# EAGLE board shield10 (EAGLE 8.7.1)
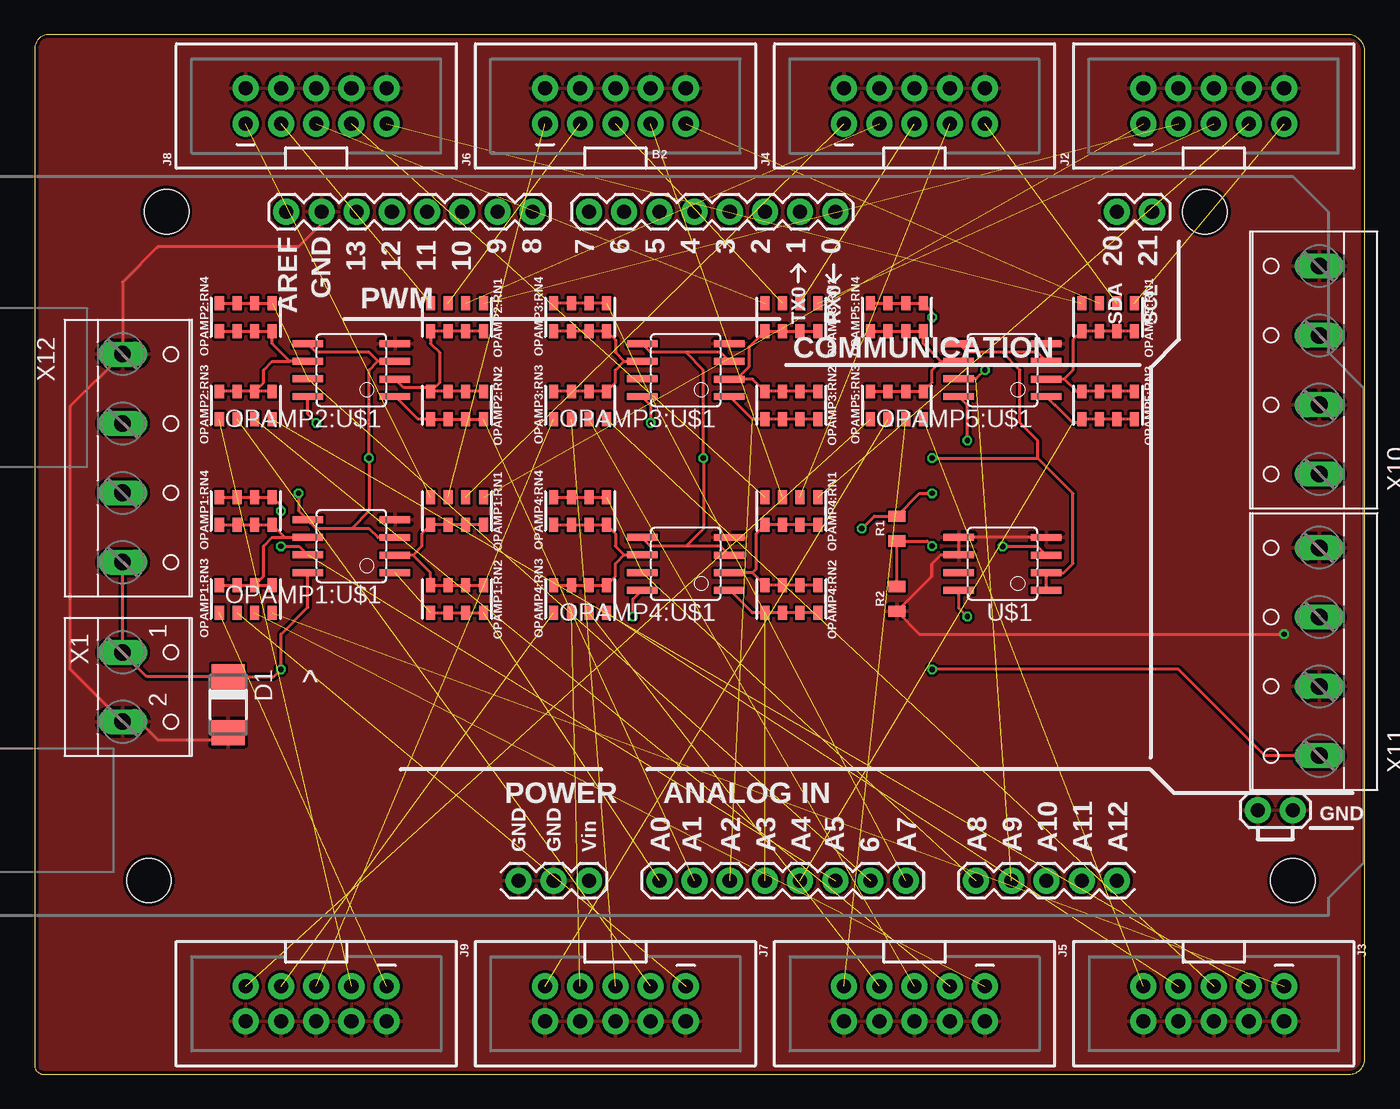
[diagram p0: board, top side]
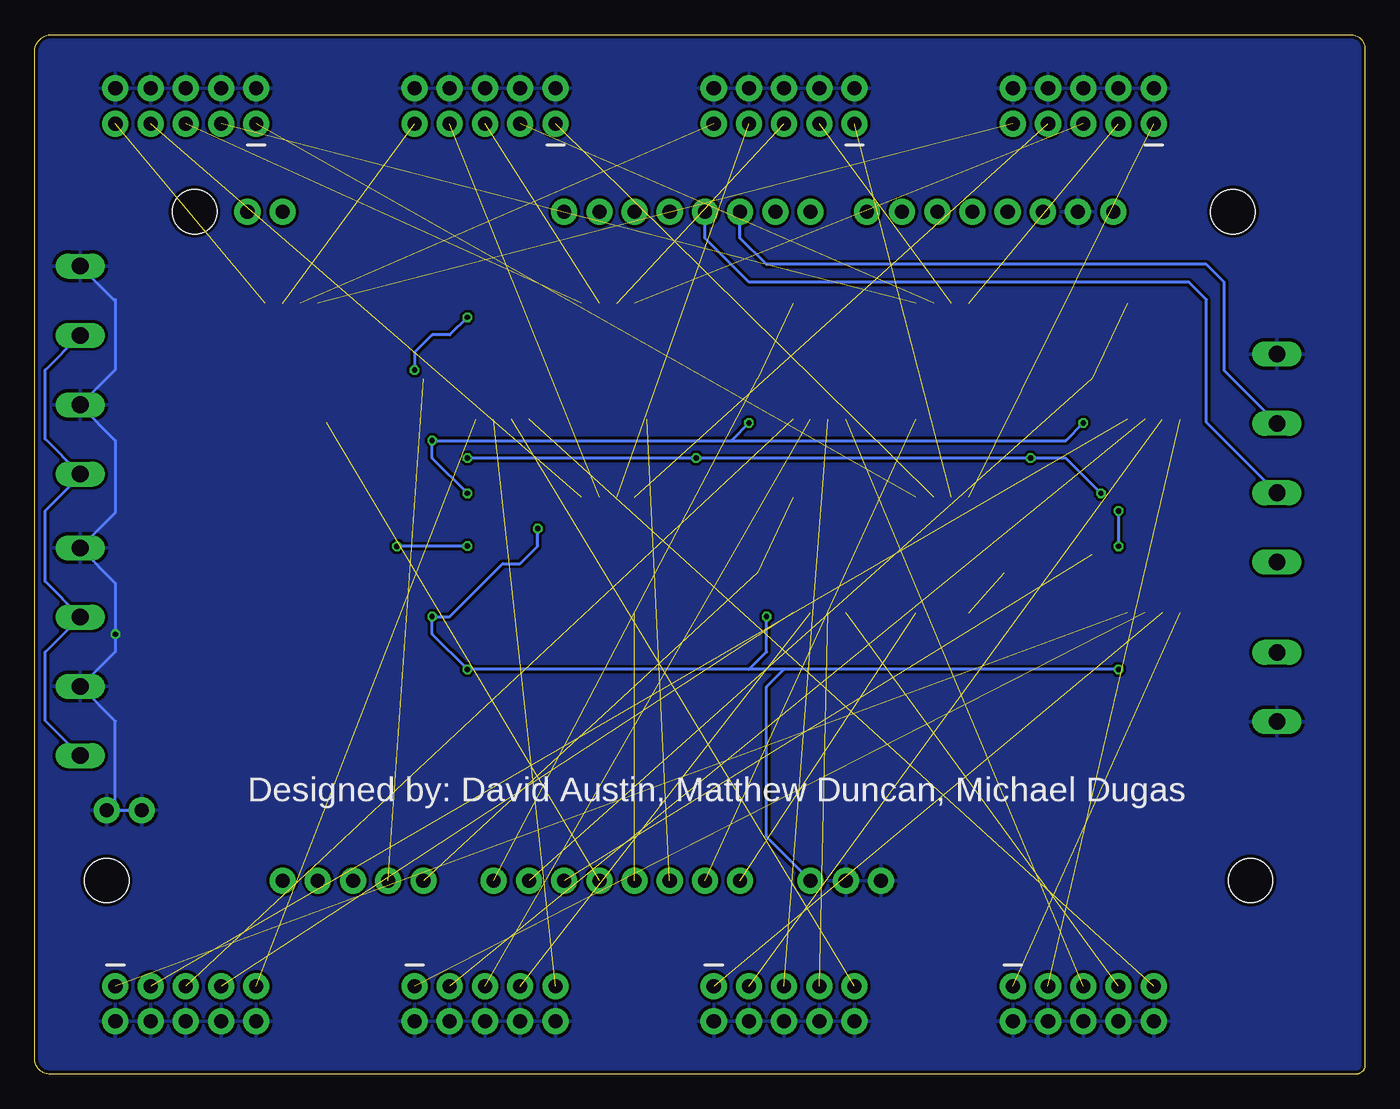
[diagram p1: board, bottom side, seen from below]

Size 96 x 75 mm. Coordinates in mm from the lower left corner, seen from the top.
Outline: 0,74 0,0.64 arc90 0.64,0 94.87,0 arc90 96,1.13 96,73.78 arc90 94.78,75 1,75 arc90 0,74
Copper layers (1*16): Top 0.035mm / dielectric 1.5mm / Bottom 0.035mm
Design rules "Dirty8TS *": minimum track width 5mil, minimum drill 12mil, track to track 8mil, track to pad 8mil, pad to pad 8mil, via to via 8mil, smd to smd 0mil, copper to edge 10mil, drill to drill 10mil, minimum pad ring 10mil, minimum via ring 6mil, stop-mask expansion 2mil, vias tented up to drill 25mil, thermal gap 10mil
Net classes: 0 default: width 0.203 mm, drill 0.381 mm, clearance 0.203 mm

## Footprints (pad centres in the part's own frame; a part is rotated, then mirrored left to right if it is on the bottom)
ARDUINO_MEGA_EDIT = drill 1.016 pad 1.88: 0 13.97,24.13; 1 11.43,24.13; 2 8.89,24.13; 3 6.35,24.13; 4 3.81,24.13; 5 1.27,24.13; 6 -1.27,24.13; 7 -3.81,24.13; 8 -7.874,24.13; 9 -10.414,24.13; 10 -12.954,24.13; 11 -15.494,24.13; 12 -18.034,24.13; 13 -20.574,24.13; 20 34.29,24.13; 21 36.83,24.13; A0 1.27,-24.13; A1 3.81,-24.13; A2 6.35,-24.13; A3 8.89,-24.13; A4 11.43,-24.13; A5 13.97,-24.13; A6 16.51,-24.13; A7 19.05,-24.13; A8 24.13,-24.13; A9 26.67,-24.13; A10 29.21,-24.13; A11 31.75,-24.13; A12 34.29,-24.13; AREF -25.654,24.13; GND@0 -8.89,-24.13; GND@1 -6.35,-24.13; GND@2 44.45,-19.05; GND@3 46.99,-19.05; GND@4 -23.114,24.13; VIN -3.81,-24.13 | hole 3.2: -34.29,24.13; -35.56,-24.13; 40.64,24.13; 46.99,-24.13
DO-214AC = smd 1.8 x 2.4: A 2.025,0; C -2.025,0
2X5-SHROUDED = drill 1.016 pad 1.88: 1 -1.27,5.08; 2 1.27,5.08; 3 -1.27,2.54; 4 1.27,2.54; 5 -1.27,0; 6 1.27,0; 7 -1.27,-2.54; 8 1.27,-2.54; 9 -1.27,-5.08; 10 1.27,-5.08
0805-ARV_EDIT10K = smd 0.65 x 1: 1 -1.905,-1; 2 -0.635,-1; 3 0.635,-1; 4 1.905,-1; 5 1.905,1; 6 0.635,1; 7 -0.635,1; 8 -1.905,1
SOIC8 = smd 0.5 x 2.2: 1 -1.905,-3.154; 2 -0.645,-3.154; 3 0.625,-3.154; 4 1.895,-3.154; 5 1.905,3.154; 6 0.635,3.154; 7 -0.635,3.154; 8 -1.905,3.154
0805 = smd 0.8 x 1.2: 1 -0.9,0; 2 0.9,0
W237-102 = drill 1.194 long: 1 -2.5,-1.27; 2 2.5,-1.27
W237-4 = drill 1.194 long: 1 -7.5,-1.27; 2 -2.5,-1.27; 3 2.5,-1.27; 4 7.5,-1.27

## Placement (x,y rotation side)
B2  ARDUINO_MEGA_R3_EDIT  [ARDUINO_MEGA_EDIT]  43.81,38.1 0 top
D1  [DO-214AC]  13.97,26.67 270 top
J2  AVR_SPI_PROG_5X2_NEWPTH2  [2X5-SHROUDED]  85.09,69.85 90 top
J3  AVR_SPI_PROG_5X2_NEWPTH2  [2X5-SHROUDED]  85.09,5.08 270 top
J4  AVR_SPI_PROG_5X2_NEWPTH2  [2X5-SHROUDED]  63.5,69.85 90 top
J5  AVR_SPI_PROG_5X2_NEWPTH2  [2X5-SHROUDED]  63.5,5.08 270 top
J6  AVR_SPI_PROG_5X2_NEWPTH2  [2X5-SHROUDED]  41.91,69.85 90 top
J7  AVR_SPI_PROG_5X2_NEWPTH2  [2X5-SHROUDED]  41.91,5.08 270 top
J8  AVR_SPI_PROG_5X2_NEWPTH2  [2X5-SHROUDED]  20.32,69.85 90 top
J9  AVR_SPI_PROG_5X2_NEWPTH2  [2X5-SHROUDED]  20.32,5.08 270 top
OPAMP1:RN1  10k  [0805-ARV_EDIT10K]  30.48,40.64 180 top
OPAMP1:RN2  10k  [0805-ARV_EDIT10K]  30.48,34.29 180 top
OPAMP1:RN3  10k  [0805-ARV_EDIT10K]  15.24,34.29 0 top
OPAMP1:RN4  10k  [0805-ARV_EDIT10K]  15.24,40.64 0 top
OPAMP1:U$1  MCP6002SMT  [SOIC8]  22.86,38.1 90 top
OPAMP2:RN1  10k  [0805-ARV_EDIT10K]  30.48,54.61 180 top
OPAMP2:RN2  10k  [0805-ARV_EDIT10K]  30.48,48.26 180 top
OPAMP2:RN3  10k  [0805-ARV_EDIT10K]  15.24,48.26 0 top
OPAMP2:RN4  10k  [0805-ARV_EDIT10K]  15.24,54.61 0 top
OPAMP2:U$1  MCP6002SMT  [SOIC8]  22.86,50.8 90 top
OPAMP3:RN1  10k  [0805-ARV_EDIT10K]  54.61,54.61 180 top
OPAMP3:RN2  10k  [0805-ARV_EDIT10K]  54.61,48.26 180 top
OPAMP3:RN3  10k  [0805-ARV_EDIT10K]  39.37,48.26 0 top
OPAMP3:RN4  10k  [0805-ARV_EDIT10K]  39.37,54.61 0 top
OPAMP3:U$1  MCP6002SMT  [SOIC8]  46.99,50.8 90 top
OPAMP4:RN1  10k  [0805-ARV_EDIT10K]  54.61,40.64 180 top
OPAMP4:RN2  10k  [0805-ARV_EDIT10K]  54.61,34.29 180 top
OPAMP4:RN3  10k  [0805-ARV_EDIT10K]  39.37,34.29 0 top
OPAMP4:RN4  10k  [0805-ARV_EDIT10K]  39.37,40.64 0 top
OPAMP4:U$1  MCP6002SMT  [SOIC8]  46.99,36.83 90 top
OPAMP5:RN1  10k  [0805-ARV_EDIT10K]  77.47,54.61 180 top
OPAMP5:RN2  10k  [0805-ARV_EDIT10K]  77.47,48.26 180 top
OPAMP5:RN3  10k  [0805-ARV_EDIT10K]  62.23,48.26 0 top
OPAMP5:RN4  10k  [0805-ARV_EDIT10K]  62.23,54.61 0 top
OPAMP5:U$1  MCP6002SMT  [SOIC8]  69.85,50.8 90 top
R1  1k  [0805]  62.23,39.37 90 top
R2  1k  [0805]  62.23,34.29 90 top
U$1  MCP6002SMT  [SOIC8]  69.85,36.83 90 top
X1  [W237-102]  7.62,27.94 270 top
X10  [W237-4]  91.44,50.8 90 top
X11  [W237-4]  91.44,30.48 90 top
X12  [W237-4]  7.62,44.45 270 top

## Library data of the parts
B2 = SparkFun-Boards
D1 = diode
J2-J9 = SparkFun-Connectors; PROD_ID: CONN-08671; SF_ID: PRT-08506
OPAMP1:RN1-OPAMP1:RN4 OPAMP2:RN1-OPAMP2:RN4 OPAMP3:RN1-OPAMP3:RN4 OPAMP4:RN1-OPAMP4:RN4 OPAMP5:RN1-OPAMP5:RN4 R1 R2 = SparkFun-Resistors
OPAMP1:U$1 OPAMP2:U$1 OPAMP3:U$1 OPAMP4:U$1 OPAMP5:U$1 U$1 = adam - ics
X1 = con-wago-500; MPN: 237-102; OC_FARNELL: unknown; OC_NEWARK: 70K9898
X10-X12 = con-wago-500; OC_FARNELL: unknown; OC_NEWARK: unknown

## Nets
+5V: B2.VIN D1.C OPAMP1:U$1.8 OPAMP2:U$1.8 OPAMP3:U$1.8 OPAMP4:U$1.8 OPAMP5:U$1.8 R1.2 U$1.8 X1.1 X10.1 X10.3 X11.1 X11.3 X12.4
A1O: B2.A0 OPAMP1:RN2.5 OPAMP1:RN2.6 OPAMP1:RN2.7 OPAMP1:RN2.8 OPAMP1:U$1.1
A2O: B2.A1 OPAMP2:RN2.5 OPAMP2:RN2.6 OPAMP2:RN2.7 OPAMP2:RN2.8 OPAMP2:U$1.1
A3O: B2.A2 OPAMP3:RN2.5 OPAMP3:RN2.6 OPAMP3:RN2.7 OPAMP3:RN2.8 OPAMP3:U$1.1
A4O: B2.A3 OPAMP4:RN2.5 OPAMP4:RN2.6 OPAMP4:RN2.7 OPAMP4:RN2.8 OPAMP4:U$1.1
A5O: B2.A4 OPAMP5:RN2.5 OPAMP5:RN2.6 OPAMP5:RN2.7 OPAMP5:RN2.8 OPAMP5:U$1.1
A6O: B2.A5 OPAMP1:RN4.5 OPAMP1:RN4.6 OPAMP1:RN4.7 OPAMP1:RN4.8 OPAMP1:U$1.7
A7O: B2.A6 OPAMP2:RN4.5 OPAMP2:RN4.6 OPAMP2:RN4.7 OPAMP2:RN4.8 OPAMP2:U$1.7
A8O: B2.A7 OPAMP3:RN4.5 OPAMP3:RN4.6 OPAMP3:RN4.7 OPAMP3:RN4.8 OPAMP3:U$1.7
A9O: B2.A8 OPAMP4:RN4.5 OPAMP4:RN4.6 OPAMP4:RN4.7 OPAMP4:RN4.8 OPAMP4:U$1.7
A10O: B2.A9 OPAMP5:RN4.5 OPAMP5:RN4.6 OPAMP5:RN4.7 OPAMP5:RN4.8 OPAMP5:U$1.7
CI: B2.4 X12.3
DI: B2.5 X12.2
GND: B2.GND@0 B2.GND@1 B2.GND@2 B2.GND@3 B2.GND@4 D1.A J2.2 J2.4 J2.6 J2.8 J2.10 J3.2 J3.4 J3.6 J3.8 J3.10 J4.2 J4.4 J4.6 J4.8 J4.10 J5.2 J5.4 J5.6 J5.8 J5.10 J6.2 J6.4 J6.6 J6.8 J6.10 J7.2 J7.4 J7.6 J7.8 J7.10 J8.2 J8.4 J8.6 J8.8 J8.10 J9.2 J9.4 J9.6 J9.8 J9.10 OPAMP1:U$1.4 OPAMP2:U$1.4 OPAMP3:U$1.4 OPAMP4:U$1.4 OPAMP5:U$1.4 R2.1 U$1.4 U$1.5 U$1.6 X1.2 X10.2 X10.4 X11.2 X11.4 X12.1
N$1: U$1.7
N$2: R1.1 R2.2 U$1.3
OPAMP1:N$1: OPAMP1:RN3.5 OPAMP1:RN3.6 OPAMP1:RN3.7 OPAMP1:RN3.8 OPAMP1:RN4.1 OPAMP1:RN4.2 OPAMP1:RN4.3 OPAMP1:RN4.4 OPAMP1:U$1.6
OPAMP1:N$2: OPAMP1:RN1.5 OPAMP1:RN1.6 OPAMP1:RN1.7 OPAMP1:RN1.8 OPAMP1:RN2.1 OPAMP1:RN2.2 OPAMP1:RN2.3 OPAMP1:RN2.4 OPAMP1:U$1.2
OPAMP2:N$1: OPAMP2:RN3.5 OPAMP2:RN3.6 OPAMP2:RN3.7 OPAMP2:RN3.8 OPAMP2:RN4.1 OPAMP2:RN4.2 OPAMP2:RN4.3 OPAMP2:RN4.4 OPAMP2:U$1.6
OPAMP2:N$2: OPAMP2:RN1.5 OPAMP2:RN1.6 OPAMP2:RN1.7 OPAMP2:RN1.8 OPAMP2:RN2.1 OPAMP2:RN2.2 OPAMP2:RN2.3 OPAMP2:RN2.4 OPAMP2:U$1.2
OPAMP3:N$1: OPAMP3:RN3.5 OPAMP3:RN3.6 OPAMP3:RN3.7 OPAMP3:RN3.8 OPAMP3:RN4.1 OPAMP3:RN4.2 OPAMP3:RN4.3 OPAMP3:RN4.4 OPAMP3:U$1.6
OPAMP3:N$2: OPAMP3:RN1.5 OPAMP3:RN1.6 OPAMP3:RN1.7 OPAMP3:RN1.8 OPAMP3:RN2.1 OPAMP3:RN2.2 OPAMP3:RN2.3 OPAMP3:RN2.4 OPAMP3:U$1.2
OPAMP4:N$1: OPAMP4:RN3.5 OPAMP4:RN3.6 OPAMP4:RN3.7 OPAMP4:RN3.8 OPAMP4:RN4.1 OPAMP4:RN4.2 OPAMP4:RN4.3 OPAMP4:RN4.4 OPAMP4:U$1.6
OPAMP4:N$2: OPAMP4:RN1.5 OPAMP4:RN1.6 OPAMP4:RN1.7 OPAMP4:RN1.8 OPAMP4:RN2.1 OPAMP4:RN2.2 OPAMP4:RN2.3 OPAMP4:RN2.4 OPAMP4:U$1.2
OPAMP5:N$1: OPAMP5:RN3.5 OPAMP5:RN3.6 OPAMP5:RN3.7 OPAMP5:RN3.8 OPAMP5:RN4.1 OPAMP5:RN4.2 OPAMP5:RN4.3 OPAMP5:RN4.4 OPAMP5:U$1.6
OPAMP5:N$2: OPAMP5:RN1.5 OPAMP5:RN1.6 OPAMP5:RN1.7 OPAMP5:RN1.8 OPAMP5:RN2.1 OPAMP5:RN2.2 OPAMP5:RN2.3 OPAMP5:RN2.4 OPAMP5:U$1.2
S1A: J2.1 OPAMP1:RN1.1
S1B: J3.1 OPAMP1:RN3.4
S2A: J2.3 OPAMP2:RN1.1
S2B: J3.3 OPAMP2:RN3.4
S3A: J2.5 OPAMP3:RN1.1
S3B: J3.5 OPAMP3:RN3.4
S4A: J2.7 OPAMP4:RN1.1
S4B: J3.7 OPAMP4:RN3.4
S5A: J2.9 OPAMP5:RN1.1
S5B: J3.9 OPAMP5:RN3.4
S6A: J4.1 OPAMP1:RN1.2
S6B: J5.1 OPAMP1:RN3.3
S7A: J4.3 OPAMP2:RN1.2
S7B: J5.3 OPAMP2:RN3.3
S8A: J4.5 OPAMP3:RN1.2
S8B: J5.5 OPAMP3:RN3.3
S9A: J4.7 OPAMP4:RN1.2
S9B: J5.7 OPAMP4:RN3.3
S10A: J4.9 OPAMP5:RN1.2
S10B: J5.9 OPAMP5:RN3.3
S11A: J6.1 OPAMP1:RN1.3
S11B: J7.1 OPAMP1:RN3.2
S12A: J6.3 OPAMP2:RN1.3
S12B: J7.3 OPAMP2:RN3.2
S13A: J6.5 OPAMP3:RN1.3
S13B: J7.5 OPAMP3:RN3.2
S14A: J6.7 OPAMP4:RN1.3
S14B: J7.7 OPAMP4:RN3.2
S15A: J6.9 OPAMP5:RN1.3
S15B: J7.9 OPAMP5:RN3.2
S16A: J8.1 OPAMP1:RN1.4
S16B: J9.1 OPAMP1:RN3.1
S17A: J8.3 OPAMP2:RN1.4
S17B: J9.3 OPAMP2:RN3.1
S18A: J8.5 OPAMP3:RN1.4
S18B: J9.5 OPAMP3:RN3.1
S19A: J8.7 OPAMP4:RN1.4
S19B: J9.7 OPAMP4:RN3.1
S20A: J8.9 OPAMP5:RN1.4
S20B: J9.9 OPAMP5:RN3.1
VREF: OPAMP1:U$1.3 OPAMP1:U$1.5 OPAMP2:U$1.3 OPAMP2:U$1.5 OPAMP3:U$1.3 OPAMP3:U$1.5 OPAMP4:U$1.3 OPAMP4:U$1.5 OPAMP5:U$1.3 OPAMP5:U$1.5 U$1.1 U$1.2

## Tracks (layer width: path | path; a pad name or v marks a point on that pad's centre or on a via)
+5V  (via drill 0.38)
  Top 0.203: X12.4 X1.1 8.1,28.7 D1.C 17.27,28.7 v17.78,29.21 17.78,31.75 19.71,33.68 OPAMP1:U$1.8 | v67.31,33.02 66.7,33.63 U$1.8 | X11.3 92.67,33.02 | v59.69,39.37 60.59,40.27 R1.2 63.87,41.91 v64.77,41.91 | X11.1 88.78,22.98 82.55,29.21 v64.77,29.21 | OPAMP2:U$1.8 19.71,47.6 v20.32,46.99 | v67.31,45.72 67.31,48.28 OPAMP5:U$1.8 | OPAMP3:U$1.8 44.45,48.28 v44.45,46.99 | v43.18,33.02 43.18,34.27 OPAMP4:U$1.8
  Bottom 0.203: X11.1 95.25,25.52 95.25,30.48 95.21,30.48 X11.3 92.71,33.02 95.25,35.56 95.25,40.64 92.71,43.18 X10.1 95.25,45.84 95.25,50.8 92.75,53.3 X10.3 | v17.78,29.21 41.91,29.21 | 41.91,29.21 44.45,29.21 | 44.45,29.21 v64.77,29.21 67.31,31.75 v67.31,33.02 66.04,33.02 62.23,36.83 60.96,36.83 59.69,38.1 v59.69,39.37 | v64.77,41.91 67.31,44.45 v67.31,45.72 45.72,45.72 | 45.72,45.72 21.59,45.72 v20.32,46.99 | v44.45,46.99 45.72,45.72 | 44.45,29.21 43.18,30.48 v43.18,33.02 | B2.VIN 43.18,17.14 43.18,27.94 41.91,29.21
A1O  (2 unrouted)
  Top 0.203: OPAMP1:RN2.5 OPAMP1:RN2.6 OPAMP1:RN2.7 OPAMP1:RN2.8
A2O  (1 unrouted)
  Top 0.203: OPAMP2:RN2.8 OPAMP2:RN2.7 OPAMP2:RN2.6 OPAMP2:RN2.5 27.67,47.26 26.04,48.9 OPAMP2:U$1.1
A3O  (1 unrouted)
  Top 0.203: OPAMP3:RN2.8 OPAMP3:RN2.7 OPAMP3:RN2.6 OPAMP3:RN2.5 51.8,47.26 50.16,48.9 OPAMP3:U$1.1
A4O  (1 unrouted)
  Top 0.203: OPAMP4:RN2.8 OPAMP4:RN2.7 OPAMP4:RN2.6 OPAMP4:RN2.5 51.8,33.29 50.16,34.92 OPAMP4:U$1.1
A5O  (1 unrouted)
  Top 0.203: OPAMP5:RN2.8 OPAMP5:RN2.7 OPAMP5:RN2.6 OPAMP5:RN2.5 75.3,46.99 74.93,46.99 73.66,48.26 73.64,48.26 OPAMP5:U$1.1
A6O  (via drill 0.38)  (1 unrouted)
  Top 0.203: OPAMP1:RN4.8 OPAMP1:RN4.7 OPAMP1:RN4.6 OPAMP1:RN4.5 17.78,41.01 v17.78,40.64 | v17.78,38.09 19.08,38.09 OPAMP1:U$1.7
  Bottom 0.203: v17.78,40.64 v17.78,38.09
A7O  (2 unrouted)
  Top 0.203: OPAMP2:RN4.8 OPAMP2:RN4.7 OPAMP2:RN4.6 OPAMP2:RN4.5
A8O  (2 unrouted)
  Top 0.203: OPAMP3:RN4.5 OPAMP3:RN4.6 OPAMP3:RN4.7 OPAMP3:RN4.8
A9O  (2 unrouted)
  Top 0.203: OPAMP4:RN4.8 OPAMP4:RN4.7 OPAMP4:RN4.6 OPAMP4:RN4.5
A10O  (via drill 0.38)  (1 unrouted)
  Top 0.203: OPAMP5:RN4.8 OPAMP5:RN4.7 OPAMP5:RN4.6 OPAMP5:RN4.5 64.77,54.98 v64.77,54.61 | v68.58,50.8 67.94,50.16 OPAMP5:U$1.7
  Bottom 0.203: v64.77,54.61 66.04,53.34 67.31,53.34 68.58,52.07 v68.58,50.8
CI
  Bottom 0.203: X12.3 11.43,47.03 11.43,55.88 12.7,57.15 44.45,57.15 47.62,60.33 B2.4
DI
  Bottom 0.203: X12.2 10.16,50.76 10.16,57.15 11.43,58.42 43.18,58.42 45.09,60.33 B2.5
GND  (via drill 0.38)
  Top 0.203: D1.A 13.46,24.13 8.89,24.13 7.58,25.44 X1.2 2.54,29.25 2.54,48.14 X12.1 6.35,57.15 8.89,59.69 19.05,59.69 20.7,61.34 B2.GND@4 | U$1.4 U$1.5 U$1.6 65.41,37.47 64.77,36.83 64.77,35.93 R2.1 63.87,31.75 v90.17,31.75
  Bottom 0.203: X10.4 90.29,55.88 90.17,55.88 90.17,50.84 X10.2 92.71,48.26 90.17,45.72 90.17,40.52 X11.4 90.17,35.44 v90.17,31.75 90.17,30.48 92.67,27.98 | 92.67,27.98 X11.2 | B2.GND@2 B2.GND@3 90.17,19.68 90.17,25.48 92.67,27.98
  pour Top: 0,82.55 99.06,82.55 99.06,-1.27 -4.45,-1.27 -4.45,82.55
  pour Bottom: -6.35,84.45 100.97,84.45 100.97,83.19 100.97,-4.45 -6.35,-4.45 -6.35,83.82
N$2  (via drill 0.38)
  Top 0.203: v64.77,38.1 64.4,38.47 R1.1 R2.2 | v69.85,38.08 72.38,38.08 U$1.3
  Bottom 0.203: v64.77,38.1 69.85,38.1 v69.85,38.08
OPAMP1:N$1
  Top 0.203: OPAMP1:RN4.1 OPAMP1:RN4.2 OPAMP1:RN4.3 OPAMP1:RN4.4 18.05,38.73 | 18.05,38.73 OPAMP1:U$1.6 | OPAMP1:RN3.8 OPAMP1:RN3.7 OPAMP1:RN3.6 | OPAMP1:RN3.6 OPAMP1:RN3.5 | OPAMP1:RN3.6 16.51,35.92 16.51,38.1 17.14,38.73 18.05,38.73
OPAMP1:N$2
  Top 0.203: OPAMP1:RN2.1 OPAMP1:RN2.2 OPAMP1:RN2.3 OPAMP1:RN2.4 28.57,36.2 27.32,37.45 27.3,37.45 | OPAMP1:RN1.8 OPAMP1:RN1.7 OPAMP1:RN1.6 OPAMP1:RN1.5 27.94,39.01 27.94,38.1 27.3,37.45 | 27.3,37.45 OPAMP1:U$1.2
OPAMP2:N$1
  Top 0.203: OPAMP2:RN3.5 OPAMP2:RN3.6 | OPAMP2:RN3.6 OPAMP2:RN3.7 OPAMP2:RN3.8 | OPAMP2:RN4.1 OPAMP2:RN4.2 OPAMP2:RN4.3 OPAMP2:RN4.4 17.14,52.7 18.41,51.44 | OPAMP2:U$1.6 19.05,51.44 18.41,51.44 | OPAMP2:RN3.6 16.51,49.9 16.51,50.8 17.14,51.44 18.41,51.44
OPAMP2:N$2
  Top 0.203: OPAMP2:RN2.1 OPAMP2:RN2.2 OPAMP2:RN2.3 OPAMP2:RN2.4 | OPAMP2:RN2.4 28.3,49.53 26.64,49.53 OPAMP2:U$1.2 | OPAMP2:RN2.4 29.21,49.9 29.21,52.07 28.57,52.7 OPAMP2:RN1.5 OPAMP2:RN1.6 OPAMP2:RN1.7 OPAMP2:RN1.8
OPAMP3:N$1
  Top 0.203: OPAMP3:RN3.8 OPAMP3:RN3.7 OPAMP3:RN3.6 OPAMP3:RN3.5 41.91,49.9 41.91,50.8 42.55,51.44 | OPAMP3:RN4.1 OPAMP3:RN4.2 OPAMP3:RN4.3 OPAMP3:RN4.4 41.91,52.98 41.91,52.07 42.55,51.44 | OPAMP3:U$1.6 43.18,51.44 42.55,51.44
OPAMP3:N$2
  Top 0.203: OPAMP3:RN1.8 OPAMP3:RN1.7 OPAMP3:RN1.6 OPAMP3:RN1.5 51.55,52.45 51.55,51.05 50.8,50.3 50.8,50.16 | OPAMP3:RN2.1 OPAMP3:RN2.2 OPAMP3:RN2.3 OPAMP3:RN2.4 51.81,50.16 50.8,50.16 | 50.8,50.16 OPAMP3:U$1.2
OPAMP4:N$1
  Top 0.203: OPAMP4:RN3.8 OPAMP4:RN3.7 OPAMP4:RN3.6 OPAMP4:RN3.5 41.91,35.92 41.91,36.83 42.55,37.47 | OPAMP4:U$1.6 43.18,37.47 42.55,37.47 | OPAMP4:RN4.1 OPAMP4:RN4.2 OPAMP4:RN4.3 OPAMP4:RN4.4 41.91,39.01 41.91,38.1 42.55,37.47
OPAMP4:N$2
  Top 0.203: OPAMP4:RN2.1 OPAMP4:RN2.2 OPAMP4:RN2.3 OPAMP4:RN2.4 51.81,36.19 | 51.81,36.19 OPAMP4:U$1.2 | OPAMP4:RN1.8 OPAMP4:RN1.7 OPAMP4:RN1.6 OPAMP4:RN1.5 52.07,39.01 52.07,36.45 51.81,36.19
OPAMP5:N$1
  Top 0.203: OPAMP5:RN4.1 OPAMP5:RN4.2 OPAMP5:RN4.3 OPAMP5:RN4.4 64.14,52.7 65.41,51.44 | OPAMP5:RN3.8 OPAMP5:RN3.7 OPAMP5:RN3.6 OPAMP5:RN3.5 64.77,49.9 64.77,50.8 65.41,51.44 | OPAMP5:U$1.6 66.04,51.44 65.41,51.44
OPAMP5:N$2
  Top 0.203: OPAMP5:RN2.1 OPAMP5:RN2.2 OPAMP5:RN2.3 OPAMP5:RN2.4 75.2,49.26 74.31,50.16 74.28,50.16 | OPAMP5:U$1.2 73.66,50.16 74.28,50.16 | OPAMP5:RN1.8 OPAMP5:RN1.7 OPAMP5:RN1.6 OPAMP5:RN1.5 74.93,52.98 74.93,50.8 74.28,50.16
S1A  (1 unrouted)
S1B  (1 unrouted)
S2A  (1 unrouted)
S2B  (1 unrouted)
S3A  (1 unrouted)
S3B  (1 unrouted)
S4A  (1 unrouted)
S4B  (1 unrouted)
S5A  (1 unrouted)
S5B  (1 unrouted)
S6A  (1 unrouted)
S6B  (1 unrouted)
S7A  (1 unrouted)
S7B  (1 unrouted)
S8A  (1 unrouted)
S8B  (1 unrouted)
S9A  (1 unrouted)
S9B  (1 unrouted)
S10A  (1 unrouted)
S10B  (1 unrouted)
S11A  (1 unrouted)
S11B  (1 unrouted)
S12A  (1 unrouted)
S12B  (1 unrouted)
S13A  (1 unrouted)
S13B  (1 unrouted)
S14A  (1 unrouted)
S14B  (1 unrouted)
S15A  (1 unrouted)
S15B  (1 unrouted)
S16A  (1 unrouted)
S16B  (1 unrouted)
S17A  (1 unrouted)
S17B  (1 unrouted)
S18A  (1 unrouted)
S18B  (1 unrouted)
S19A  (1 unrouted)
S19B  (1 unrouted)
S20A  (1 unrouted)
S20B  (1 unrouted)
VREF  (via drill 0.38)
  Top 0.203: U$1.1 U$1.2 74.28,36.19 74.93,36.83 74.93,41.91 72.39,44.45 | v19.05,41.91 19.05,40.66 OPAMP1:U$1.5 19.71,39.98 20.32,39.37 22.86,39.37 | v64.77,44.45 72.39,44.45 | 72.39,44.45 72.39,45.72 71.12,46.99 71.12,50.8 69.85,52.07 | OPAMP5:U$1.3 72.36,52.07 69.85,52.07 | OPAMP5:U$1.5 67.33,52.07 69.85,52.07 | OPAMP3:U$1.3 49.53,52.04 49.53,52.07 46.99,52.07 | 46.99,52.07 44.45,52.07 43.84,52.68 OPAMP3:U$1.5 | OPAMP2:U$1.3 24.77,51.42 | 24.77,51.42 24.13,52.07 20.32,52.07 19.71,52.68 OPAMP2:U$1.5 | OPAMP4:U$1.3 49.5,38.1 46.99,38.1 | OPAMP4:U$1.5 43.84,38.71 44.45,38.1 46.99,38.1 | OPAMP1:U$1.3 24.77,38.73 24.13,39.37 22.86,39.37 | 24.77,51.42 24.75,51.42 24.13,50.8 v24.13,44.45 24.13,40.64 22.86,39.37 | 46.99,52.07 48.26,50.8 v48.26,44.45 48.26,39.37 46.99,38.1
  Bottom 0.203: v19.05,41.91 21.59,44.45 v24.13,44.45 v48.26,44.45 v64.77,44.45

## Text on the board
tPlace: ^
bPlace: Designed by: David Austin, Matthew Duncan, Michael Dugas